# Altium PCB Testkit.PcbDoc
Units mm, origin at the board's own origin, x right, y up, seen from the top; angles counter-clockwise.
Board outline 114.3 x 66.04 mm, 2 copper layers (Top Layer, Bottom Layer), stack 1.534 mm thick; 15 components, 15 nets, 88 pads, 0 vias.
Unrouted connection lines stored in the file: 73.
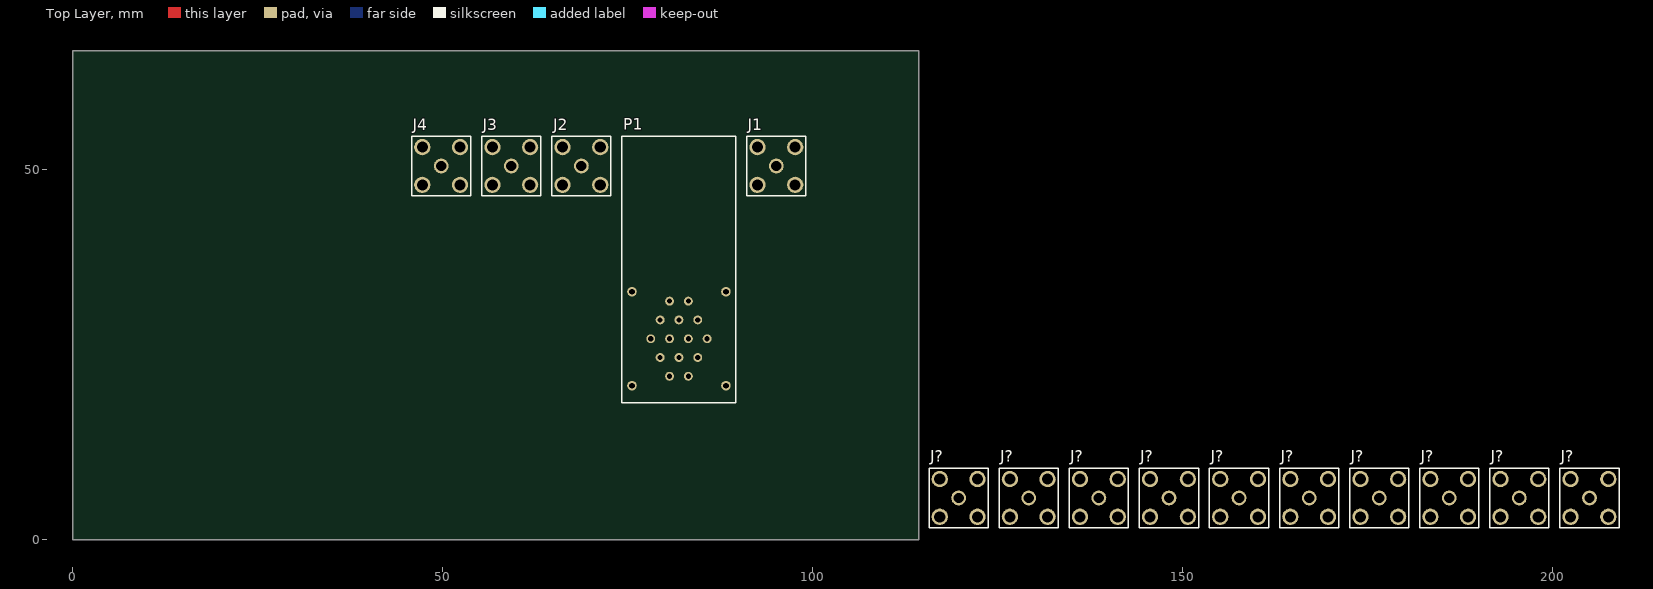
[diagram p0: Top Layer view]
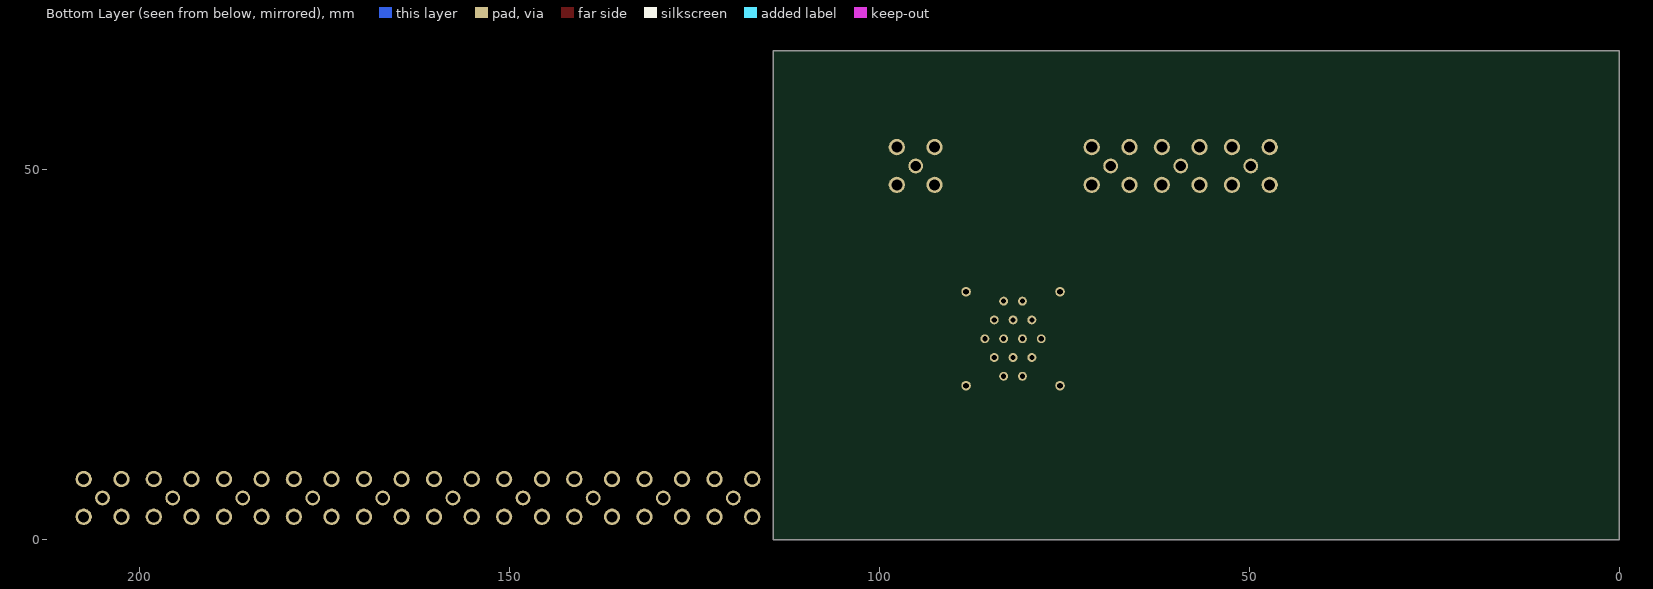
[diagram p1: Bottom Layer view, seen from below]

## Layer stack, top to bottom
Top Solder: solder mask 0.0127, Solder Resist, Dk 3.3
Top Layer: signal copper 0.0178
Dielectric1: core 1.4986, FR-4, Dk 4.3
Bottom Layer: signal copper 0.0178
Bottom Solder: solder mask 0.0127, Solder Resist, Dk 3.3

## Board outline
0,0 114.3,0 114.3,66.04 0,66.04

## Design rules (kind name [scope] priority, off if disabled: settings)
Clearance [All] p1: gap=0.254 ignorepadtopadclearanceinfootprint=FALSE
DiffPairsRouting [All] p1: maxlimit=0.254 minlimit=0.254 mostfreqgap=0.254 toplayer_minwidth=0.254 toplayer_maxwidth=0.254 toplayer_prefwidth=0.254 bottomlayer_minwidth=0.254 bottomlayer_maxwidth=0.254 bottomlayer_prefwidth=0.254 maxuncoupledlength=12.7
HoleSize [All] p1: absolutevalues=TRUE maxlimit=7.62 minlimit=0.254 maxpercent=80.000 minpercent=20.000
MinimumAnnularRing [All] p1: minimumring=0.254
PasteMaskExpansion [All] p1: expansion=0.254
PlaneClearance [All] p1: clearance=0.381
PlaneConnect [All] p1: pad.planeconnectstyle=Relief pad.reliefexpansion=0.508 pad.reliefentries=4 pad.reliefconductorwidth=0.254 pad.reliefairgap=0.254 via.planeconnectstyle=Direct via.reliefexpansion=0.508 via.reliefentries=4 via.reliefconductorwidth=0.254 via.reliefairgap=0.254
PolygonConnect [All] p1: thpad.connectstyle=Relief thpad.reliefconductorwidth=0.254 thpad.reliefentries=4 thpad.polygonreliefangle="90 Angle" thpad.airgapwidth=0.254 smdpad.connectstyle=Relief smdpad.reliefconductorwidth=0.254 smdpad.reliefentries=4 smdpad.polygonreliefangle="90 Angle" smdpad.airgapwidth=0.254 via.connectstyle=Direct via.reliefconductorwidth=0.254 via.reliefentries=4 via.polygonreliefangle="90 Angle" via.airgapwidth=0.254
RoomDefinition Testkit [InComponentClass('Testkit')] p1: confinementstyle=ConfineIn formatcopy=TRUE lockcomponents=FALSE outline 45.517,18.263 99.289,18.263 99.289,57.277 45.517,57.277
RoutingVias [All] p1: holewidth=0.254 width=0.508 viastyle="Through Hole" minholewidth=0.254 minwidth=0.508 maxholewidth=0.254 maxwidth=0.508
SMDNeckDown [All] p1: percent=100.000
SilkToSolderMaskClearance SilkscreenOverComponentPads [IsPad] p1: minsilkscreentomaskgap=0.254 clearancetoexposedcopper=TRUE
SolderMaskExpansion [All] p1: expansion=0.254 istentingtop=FALSE
Width [All] p1: maxlimit=0.254 minlimit=0.254 preferedwidth=0.254
24 further rules are at their usual default settings.

## Classes and differential pairs
differential pair class LNA_SIG_Q: Q
differential pair class LNA_SIG_I: I
net class LNA_SIG: I_N I_P Q_N Q_P
component class Testkit: J1 J2 J3 J4 J? P1
differential pair Q: +Q_P -Q_N
differential pair I: +I_P -I_N

## Components (designator, comment, footprint, x,y, rotation, side; value= is the part's Value field where it differs from the comment)
J1 "SMA" SMA 95.047,50.495 r0 top
J2 "SMA" SMA 68.707,50.495 r0 top
J3 "SMA" SMA 59.233,50.495 r0 top
J4 "SMA" SMA 49.759,50.495 r0 top
J? "SMA" SMA 204.927,5.639 r0 top
J? "SMA" SMA 119.685,5.639 r0 top
J? "SMA" SMA 148.107,5.639 r0 top
J? "SMA" SMA 195.453,5.639 r0 top
J? "SMA" SMA 157.582,5.639 r0 top
J? "SMA" SMA 138.633,5.639 r0 top
J? "SMA" SMA 129.159,5.639 r0 top
J? "SMA" SMA 176.53,5.639 r0 top
J? "SMA" SMA 167.056,5.639 r0 top
J? "SMA" SMA 185.979,5.639 r0 top
P1 "EPG.1B.314.NLN" EPG.1B.314.NLN 81.89,27.153 r90 top

## Footprints (in the part's own frame and the unit in brackets; to place one, negate y for a bottom-side part, rotate by r counter-clockwise, add the part's x,y. Pads: shape width x height; smd on the part's side, far side on the other; paste and mask are expansions set on the pad)
EPG.1B.314.NLN [mil]
  round 47.24 hole 27.56: 1(-200,-50) 2(-100,-100) 3(0,-150) 4(100,-100) 5(200,-50) 6(200,50) 7(100,100) 8(0,150) 9(-100,100) 10(-200,50) 11(-100,0) 12(0,-50) 13(100,0) 14(0,50)
  round 51.18 hole 31.5: 15(-250,-250) 16(250,-250) 17(250,250) 18(-250,250)
  silkscreen extent -341,-303 1077,303, body extent -343,-303 1075,303, height 554
SMA [mm]
  round 2 hole 1.4: 1(0,0)
  round 2.2 hole 1.5: 2(-2.55,-2.55) 2(-2.55,2.55) 2(2.55,-2.55) 2(2.55,2.55)
  silkscreen extent -4,-4 4,4, body extent -3.13,-3.13 3.13,3.13, height 9.55

## Part data
P1: "LEMO Connector - 14 pin EPG.1B.314.NLN Elbow receptacle for printed circuit (solder mount), Female Contact Drawing Rev. 00 Source: http://www.lemo.com/catalog/ROW/UK_English/unipole_multipole.pdf"

## Nets (pads, with @x,y where several pads share a name; then routed paths per layer and width w, separated by ;. In a path a pad name is that pad's centre, name@x,y a point inside that pad or via, vN(x,y) a via of type N, cw(c..) or ccw(c..) an arc to the next point about the centre after c; other vN are vias at no path point)
1: J?.1@176.53,5.639 P1.2
2: J?.1@148.107,5.639 P1.3
3: J?.1@119.685,5.639 P1.4
4: J?.1@185.979,5.639 P1.5
5: J?.1@157.582,5.639 P1.6
6: J?.1@129.159,5.639 P1.7
7: J?.1@195.453,5.639 P1.11
8: J?.1@167.056,5.639 P1.12
9: J?.1@138.633,5.639 P1.13
10: J?.1@204.927,5.639 P1.14
GND: J1.2 J2.2 J3.2 J4.2 J?.2 P1.15 P1.16 P1.17 P1.18
I_N: J4.1 P1.10
I_P: J1.1 P1.1
Q_N: J2.1 P1.8
Q_P: J3.1 P1.9